# Altium PCB board.PcbDoc
Units mm, origin at the board's own origin, x right, y up, seen from the top; angles counter-clockwise.
Board outline 32 x 13 mm, 2 copper layers (Top Layer, Bottom Layer), stack 0.97 mm thick; 20 components, 10 nets, 47 pads, 18 vias.
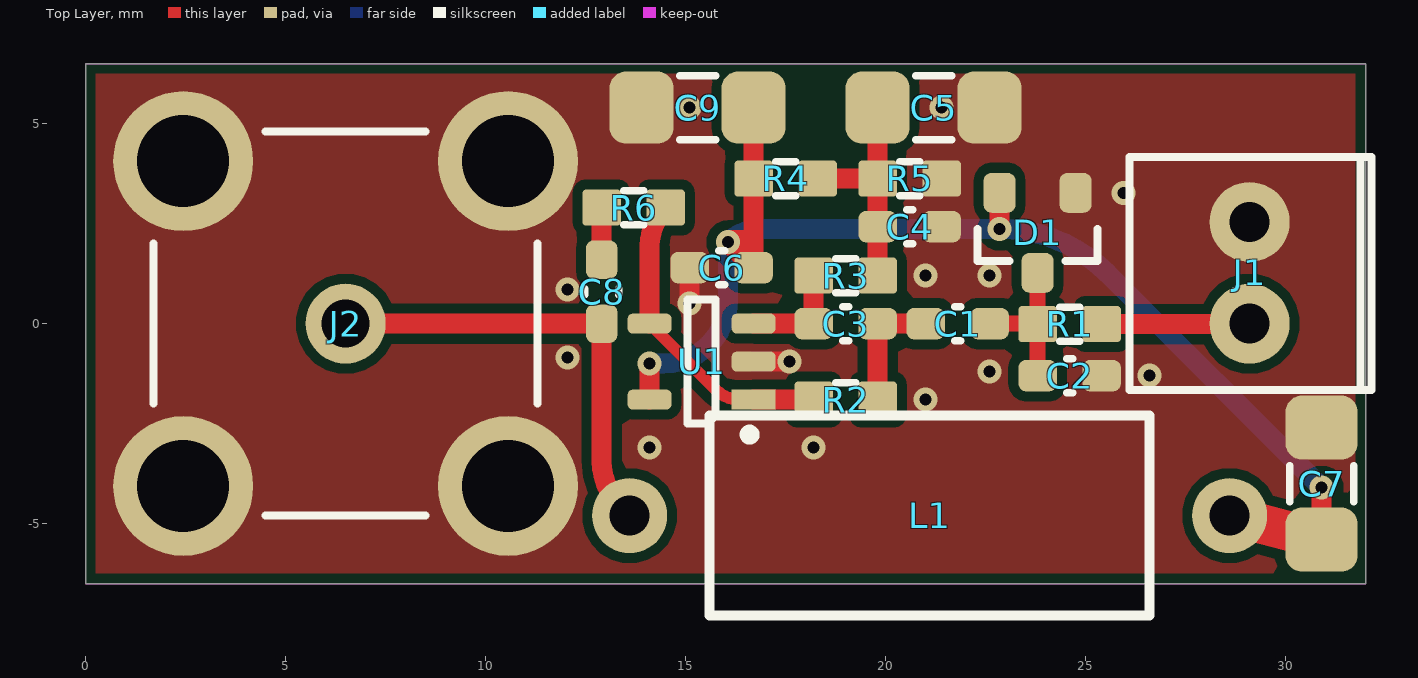
[diagram p0: Top Layer view]
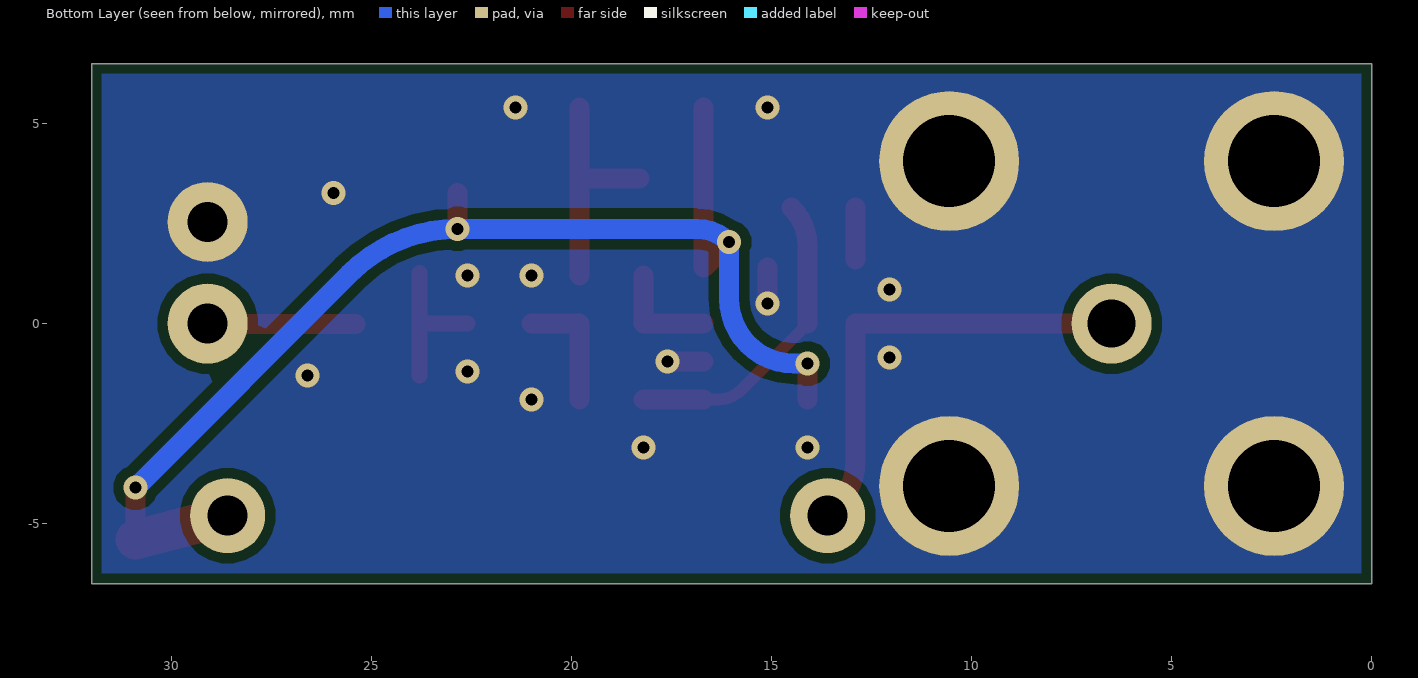
[diagram p1: Bottom Layer view, seen from below]
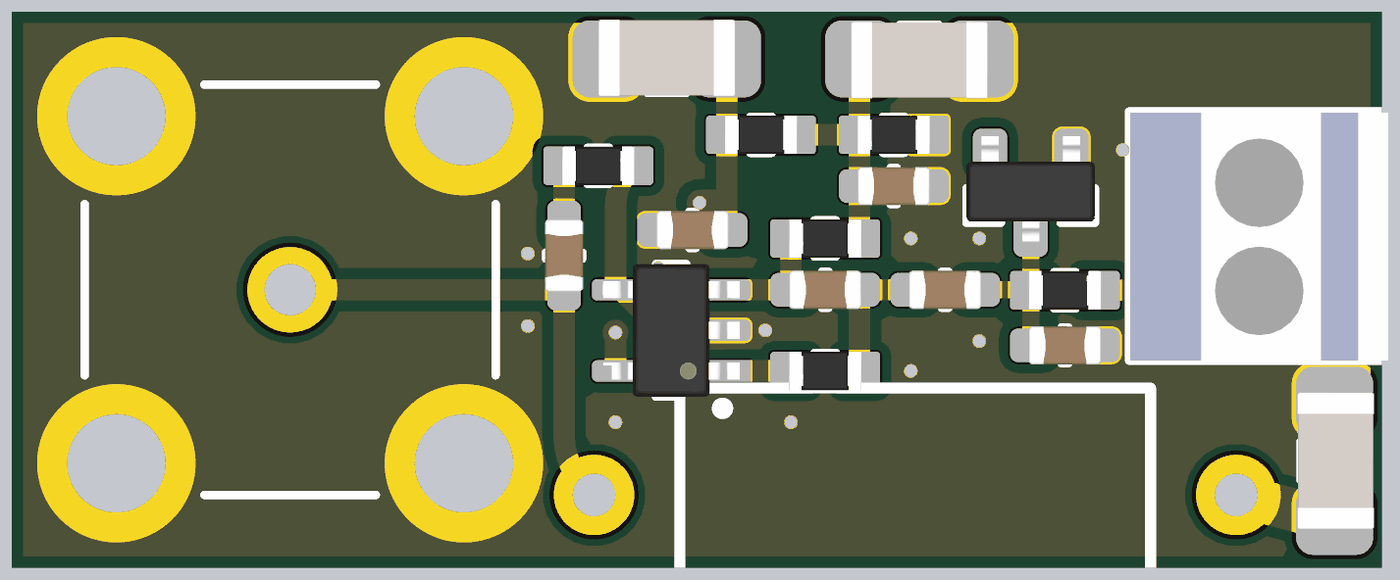
[diagram p2: 3D render of the assembled board from above, using the file's embedded part models]

## Layer stack, top to bottom
Top Solder: solder mask 0.0127, Solder Resist, Dk 3.8
Top Layer: signal copper 0.035
Dielectric: core 0.9, FR-4, Dk 4.5
Bottom Layer: signal copper 0.035
Bottom Solder: solder mask 0.0127, Solder Resist, Dk 3.8

## Board outline
0,-6.5 32,-6.5 32,6.5 0,6.5

## Design rules (kind name [scope] priority, off if disabled: settings)
AcuteAngle [All] p1: minimum=6.00000000000000E+0001 checktracksonly=FALSE
Clearance Clearance_1 [InNetClass('220') vs InNetClass('220')] p1: gap=1.2 ignorepadtopadclearanceinfootprint=FALSE
Clearance [All] p2: gap=0.25 ignorepadtopadclearanceinfootprint=FALSE except(0.13: Arc-Arc Arc-Track Arc-SMDPad Arc-Via Track-Track Track-SMDPad Track-Via SMDPad-SMDPad SMDPad-Via THPad-Via Via-Via; 0.15: Arc-THPad Arc-Text Arc-Hole Track-THPad Track-Text Track-Hole SMDPad-THPad SMDPad-Text SMDPad-Hole THPad-THPad THPad-Text THPad-Hole Via-Text Via-Hole Fill-Text Fill-Hole Poly-Text Poly-Hole Region-Text Region-Hole Text-Text Text-Hole)
ComponentClearance ComponentClearance_1 [HasFootprint('RJ45-TH_R-RJ45R10P-B000')] p1: gap=-1 collisioncheckmode=3 verticalgap=2540 showdistances=FALSE
ComponentClearance ComponentClearance_2 [HasFootprint('TP_TH_MICRO')] p2: gap=-1 collisioncheckmode=3 verticalgap=2540 showdistances=FALSE
ComponentClearance ComponentClearance_3 [HasFootprint('CONN_DG308-2.54-2P') vs HasFootprint('CONN_DG308-2.54-2P')] p3: gap=-1 collisioncheckmode=3 verticalgap=2540 showdistances=FALSE
ComponentClearance [All] p4: gap=0.3 collisioncheckmode=3 verticalgap=0.254 showdistances=FALSE
HoleSize [All] p1: absolutevalues=TRUE maxlimit=6 minlimit=0.2 maxpercent=80.000 minpercent=20.000
HoleToHoleClearance HoleToHoleClearance_1 [IsVia vs IsThruPin] p1: gap=0.7 allowstackedmicrovias=TRUE
HoleToHoleClearance [All] p2: gap=0.5 allowstackedmicrovias=TRUE
MinimumSolderMaskSliver [All] p1 off: minsoldermaskwidth=0.254
PlaneClearance [All] p1: clearance=0.45
PlaneConnect [All] p1: planeconnectstyle=Direct reliefexpansion=0.3 reliefentries=4 reliefconductorwidth=0.381 reliefairgap=0.178
PolygonConnect [All] p1: connectstyle=Direct reliefconductorwidth=0.381 reliefentries=4 polygonreliefangle="90 Angle" airgapwidth=0.356
RoutingVias [All] p1: holewidth=0.3 width=0.6 viastyle="Through Hole" minholewidth=0.2 minwidth=0.45 maxholewidth=0.9 maxwidth=1.27
SilkToSilkClearance [All] p1 off: silktosilkclearance=0.254
SilkToSolderMaskClearance [IsPad] p1 off: minsilkscreentomaskgap=0.254 clearancetoexposedcopper=TRUE
SolderMaskExpansion [All] p1: expansion=0.102 istentingtop=FALSE
UnRoutedNet [All] p1: checkbadconnections=TRUE
Width [All] p1: maxlimit=3.81 minlimit=0.14 preferedwidth=0.254
21 further rules are at their usual default settings.

## Components (designator, comment, footprint, x,y, rotation, side; value= is the part's Value field where it differs from the comment)
C1 "10p" C0603 21.8,0 r0 top
C2 "47p" C0603 24.6,-1.3 r0 top
C3 "10p" C0603 19,0 r0 top
C4 "1uF" C0603 20.6,2.425 r180 top
C5 "10uF" C1206 21.2,5.4 r180 top
C6 "1uF" C0603 15.9,1.4 r0 top
C7 "10uF" C1206 30.9,-4 r270 top
C8 "1uF" C0603 12.9,0.8 r90 top
C9 "10uF" C1206 15.3,5.4 r0 top
D1 "BAT54S" SOT-23 23.8,2.27 r90 top
J1 "CONN_DG308-2.54-2P" CONN_DG308-2.54-2P 29.1,1.27 r90 top
J2 "E-OUT" CONN_F_TYPE 6.5,0 r0 top
L1 "3.3mH" IND-TH_BD5.0-L10.5-P14.50-D0.6 21.1,-4.8 r180 top
R1 "10k" R0603 24.6,-0.012 r180 top
R2 "5M6" R0603 19,-1.9 r180 top
R3 "10M" R0603 19,1.2 r180 top
R4 "100k" R0603 17.5,3.625 r180 top
R5 "100k" R0603 20.6,3.625 r180 top
R6 "75" R0603 13.7,2.9 r180 top
U1 "ADA4891" SOT-23-5 15.4,-0.95 r0 top

## Footprints (in the part's own frame and the unit in brackets; to place one, negate y for a bottom-side part, rotate by r counter-clockwise, add the part's x,y. Pads: shape width x height; smd on the part's side, far side on the other; paste and mask are expansions set on the pad)
C0603 [mil] "Chip Capacitor"
  rrect50% 38x31 smd mask+1.97: 1(-31.5,0) 2(31.5,0)
  silkscreen extent -3,-17 3,17, body extent -33,-18 33,18, height 35
C1206 [mm] "Chip Capacitor"
  rrect50% 1.6x1.8 smd: 1(-1.4,0) 2(1.4,0)
  silkscreen extent -0.45,-0.8 0.45,0.8, body extent -1.6,-0.88 1.6,0.92, height 1.6
CONN_DG308-2.54-2P [mm]
  round 2 hole 1 mask+0: 1(1.27,0) 2(-1.27,0)
  silkscreen extent -2.92,-3.05 2.9,3, body extent -2.92,-3.05 2.88,2.97, height 7.83
CONN_F_TYPE [mm]
  round 2 hole 1.2: 1(0,0)
  round 3.5 hole 2.3: 2(-4.06,-4.06) 2(-4.06,4.06) 2(4.06,-4.06) 2(4.06,4.06)
  silkscreen extent -4.8,-4.8 4.8,4.8, body extent -21.45,-4.76 4.75,4.76, height 17.9
IND-TH_BD5.0-L10.5-P14.50-D0.6 [mil]
  round 74 hole 39.37: 1(-295.28,0) 2(295.28,0)
  silkscreen extent -217,-98 217,98, body extent -217,-98 217,98, height 216
R0603 [mil] "Chip Resistor; Body 1.6 x 0.8 mm (LxW typ)"
  rrect20% 38x35.43 smd mask+1.97: 1(-31.5,0) 2(31.5,0)
  silkscreen extent -10,-17 10,17, body extent -33,-18 33,18, height 22
SOT-23 [mm]
  rrect50% 1x0.8 smd mask+0.05: 1(1,-0.95) 2(1,0.95) 3(-1,0)
  silkscreen extent -0.7,-1.5 0.1,1.5, body extent -1.27,-1.5 1.33,1.5, height 1.1
SOT-23-5 [mm]
  rect 1.1x0.5 smd mask+0.05: 1(1.3,-0.95)
  rrect50% 1.1x0.5 smd mask+0.05: 2(1.3,0) 3(1.3,0.95) 4(-1.3,0.95) 5(-1.3,-0.95)
  silkscreen extent -0.35,-1.95 1.33,1.55, body extent -1.6,-1.55 1.6,1.55, height 1.45

## Part data
C1 C3: library part CAP, "10pF 0603"
C2: library part CAP, "47pF 0603"
C4 C6 C8: library part CAP, "1uF 0603"
C5 C7 C9: library part CAP, "10uf 50V 1206"
D1: library part BAT54S_C916425
J1 J2: library part "CONN MOLEX HDR-M 1x4"
L1: library part SRN3015-4R7M, "CKL0510*3.3mH/K-A T"
R1: library part R0201, "10k 0603"
R2: library part R0201, "5M6 0603"
R3: library part R0201, "10M 0603"
R4 R5: library part R0201, "100k 0603"
R6: library part R0201, "75R 0603"
U1: library part ADA4891-1ARJZ-R7, "ADA4891-1ARJZ-R7"

## Via types
v1: diameter 0.6, hole 0.3, Top Layer to Bottom Layer, tented both sides, 18 vias

## Nets (pads, with @x,y where several pads share a name; then routed paths per layer and width w, separated by ;. In a path a pad name is that pad's centre, name@x,y a point inside that pad or via, vN(x,y) a via of type N, cw(c..) or ccw(c..) an arc to the next point about the centre after c; other vN are vias at no path point)
GND: C2.2 C4.1 C5.1 C6.1 C7.1 C9.1 D1.1 J1.1 J2.2 R5.1 U1.2 | length 1.8
  Top Layer w0.5: v1(15.1,0.5) C6.1 ; U1.2 v1(17.6,-0.95)
  other v1: 14.1,-3.1 18.2,-3.1 21,-1.9 26.6,-1.3 22.6,-1.2 12.052,-0.848 12.052,0.848 21,1.2 22.6,1.2 25.95,3.27 15.1,5.4 21.4,5.4
NetC1_1: C1.1 C3.2 R2.1 | length 3.1
  Top Layer w0.5: R2.1 C3.2 C1.1
NetC1_2: C1.2 C2.1 D1.3 R1.2 | length 3.8
  Top Layer w0.4: C1.2 23.8,0 D1.3 ; C2.1 R1.2
NetC3_1: C3.1 R3.2 U1.3 | length 2.7
  Top Layer w0.5: U1.3 C3.1 R3.2
NetC4_2: C4.2 C5.2 R3.1 R4.1 R5.2 | length 5.7
  Top Layer w0.5: R4.1 R5.2 ; R3.1 C4.2 R5.2 ; C5.2 R5.2
NetC8_1: C8.1 J2.1 L1.2 | length 11.4
  Top Layer w0.5: J2.1 C8.1 12.9,-3.427 ccw(c14.526,-3.427) 13.376,-4.576 L1.2
NetC8_2: C8.2 R6.2 | length 1.3
  Top Layer w0.5: C8.2 R6.2
NetJ1_2: J1.2 R1.1 | length 3.7
  Top Layer w0.5: R1.1 J1.2@29.1,-0.012
NetR2_2: R2.2 R6.1 U1.1 U1.4 | length 7.9
  Top Layer w0.3: U1.4 15.753,-1.653 ccw(c16.35,-1.055) 16.35,-1.9 U1.1
  Top Layer w0.5: U1.4 14.1,1.934 cw(c15.466,1.934) R6.1 ; U1.1 R2.2
VDD: C6.2 C7.2 C9.2 D1.2 L1.1 R4.2 U1.5 | length 31.7
  Top Layer w0.5: U1.5 v1(14.1,-1) ; v1(16.064,2.036) C6.2 R4.2 C9.2 ; v1(22.85,2.37) D1.2 ; C7.2@30.9,-5 v1(30.9,-4.1)
  Top Layer w1: L1.1 C7.2
  Bottom Layer w0.5: v1(14.1,-1) 14.438,-1 ccw(c14.438,0.626) 16.064,0.626 v1(16.064,2.036) cw(c16.869,1.231) 16.869,2.37 v1(22.85,2.37) cw(c22.85,-1.445) 25.547,1.253 v1(30.9,-4.1)

## Polygon pours and split planes (outlines as drawn)
GND on Bottom Layer "NONET_L02_P-001" (solid, remove dead copper, pour order 1): -1.5,9 -1.5,-8.3 33.6,-8.3 33.6,9
GND on Top Layer "NONET_L02_P-001" (solid, remove dead copper, pour order 0): -1.5,9 -1.5,-8.3 33.6,-8.3 33.6,9

## Keep-outs
Keep-Out Layer:
  the board outline again, w0

## Other copper
Top Layer:
  rectangle net VDD: 16.077,1.7 16.8,2.338